# EAGLE board SensorStation Board v0.1 (EAGLE 7.7.0)

Size 30.15 x 74.92 mm. Coordinates in mm from the lower left corner, seen from the top.
Outline: 0,0 30.15,0 30.15,74.92 0,74.92 0,0
Copper layers (1*16): Top 0.035mm / dielectric 1.5mm / Bottom 0.035mm
Design rules "default": minimum track width 10mil, minimum drill 24mil, track to track 8mil, track to pad 8mil, pad to pad 8mil, via to via 8mil, smd to smd 8mil, copper to edge 40mil, drill to drill 8mil, minimum pad ring 10mil, minimum via ring 8mil, stop-mask expansion 4mil, vias tented up to drill 0mil, thermal gap 10mil

## Footprints (pad centres in the part's own frame; a part is rotated, then mirrored left to right if it is on the bottom)
DISPLAY-OLED-128X64 = drill 1 square: 1 -7.62,12.7 | drill 1: 2 -5.08,12.7; 3 -2.54,12.7; 4 0,12.7; 5 2.54,12.7; 6 5.08,12.7; 7 7.62,12.7 | hole 2: -11.684,11.938; 11.684,11.938; 11.684,-11.938; -11.684,-11.938
DISPLAY-OLED-128X32 = drill 1 square: 1 -17.78,-3.81 | drill 1: 2 -17.78,-1.27; 3 -17.78,1.27; 4 -17.78,3.81
3,2 = hole 3.2: 0,0
ESP12E_DEVKIT = drill 0.8 pad 1.93: 3V3@0 -11.43,-7.62; 3V3@1 11.43,5.08; 3V3@2 11.43,-17.78; AD0 -11.43,17.78; CLK -11.43,-2.54; CMD -11.43,2.54; D0 11.43,17.78; D1 11.43,15.24; D2 11.43,12.7; D3 11.43,10.16; D4 11.43,7.62; D5 11.43,0; D6 11.43,-2.54; D7 11.43,-5.08; D8 11.43,-7.62; EN -11.43,-10.16; GND@0 -11.43,-5.08; GND@1 -11.43,-15.24; GND@2 11.43,2.54; GND@3 11.43,-15.24; RST -11.43,-12.7; RSV@0 -11.43,15.24; RSV@1 -11.43,12.7; RX 11.43,-10.16; SD0 -11.43,0; SD1 -11.43,5.08; SD2 -11.43,7.62; SD3 -11.43,10.16; TX 11.43,-12.7; VIN -11.43,-17.78 | hole 3.2: -10.16,21.59; 10.16,21.59; 10.16,-21.59; -10.16,-21.59
RFM12B/69CW = smd 2.413 x 1.27: ANT 9.06,-6; GND 9.06,-2 | smd 1.27 x 1.27: CLK -7.5,-2; FFIT -7.5,0; FFS -7.5,2; GND1 -7.5,-6; IRQ -7.5,4; NINT 8.5,0; RST -7.5,-4; SCK 8.5,4; SDI 8.5,2; SDO -7.5,6; SEL 8.5,6; VDD 8.5,-4
1X01 = drill 1.016 octagon: 1 0,0
0204/5 = drill 0.813 octagon: 1 -2.54,0; 2 2.54,0
SJ_2 = smd 1.168 x 1.6: 1 -1.524,0; 2 0,0; 3 1.524,0

## Placement (x,y rotation side)
DISP1  DISPLAY-OLED-128X64  [DISPLAY-OLED-128X64]  15.24,54.61 0 top
DISP2  DISPLAY-OLED-128X32  [DISPLAY-OLED-128X32]  15.24,52.07 270 top
H1  MOUNT-HOLE3.2  [3,2]  3.81,3.81 0 top
H2  MOUNT-HOLE3.2  [3,2]  26.67,3.81 0 top
H3  MOUNT-HOLE3.2  [3,2]  26.67,71.12 0 top
H4  MOUNT-HOLE3.2  [3,2]  3.81,71.12 0 top
IC1  ESP12E_DEVKIT  [ESP12E_DEVKIT]  15.24,27.94 0 bottom
IC2  RFM12B/69CW  [RFM12B/69CW]  15.24,22.86 270 top
JP1  [1X01]  13.97,10.16 0 top
R1  4k7  [0204/5]  13.97,43.18 0 top
R2  4k7  [0204/5]  13.97,40.64 0 top
SJ1  [SJ_2]  8.89,10.16 180 top

## Library data of the parts
DISP1 DISP2 = diy-modules
H1-H4 = holes
IC1 = ESP12E_DEVKIT
IC2 = JeeLabs
JP1 = pinhead
R1 R2 = rcl
SJ1 = jumper

## Nets
3.3V: DISP1.2 DISP2.2 IC1.3V3@0 IC1.3V3@1 IC1.3V3@2 IC2.VDD R1.2 R2.2
ANTENNA: SJ1.3
CS_DISP: DISP1.7
CS_RFM: IC1.D8 IC2.SEL
DC: DISP1.6
GND: DISP1.1 DISP2.1 IC1.GND@0 IC1.GND@1 IC1.GND@2 IC1.GND@3 IC2.GND IC2.GND1
I2C_SCL: DISP2.3 IC1.D1 R1.1
I2C_SDA: DISP2.4 IC1.D2 R2.1
N$1: IC2.ANT SJ1.2
N$2: JP1.1 SJ1.1
RES: DISP1.5
RFM_IRQ: IC1.D0 IC2.IRQ
SPI_SCK: DISP1.3 IC1.D5 IC2.SCK
SPI_SDI: DISP1.4 IC1.D7 IC2.SDI
SPI_SDO: IC1.D6 IC2.SDO

## Tracks (layer width: path | path; a pad name or v marks a point on that pad's centre or on a via)
3.3V  (7 unrouted)
CS_RFM  (1 unrouted)
GND  (7 unrouted)
I2C_SCL  (2 unrouted)
I2C_SDA  (2 unrouted)
N$1  (1 unrouted)
N$2  (1 unrouted)
RFM_IRQ  (1 unrouted)
SPI_SCK  (2 unrouted)
SPI_SDI  (2 unrouted)
SPI_SDO  (1 unrouted)

## Text on the board
Measures: 30.48mm | 74.93mm